# Altium PCB 16-channel-EEG-PCB.PcbDoc (part 3 of 3)
Units mm, origin at the board's own origin, x right, y up, seen from the top; angles counter-clockwise.
Board outline 86.9 x 82.1 mm, 4 copper layers (L1 (Signal), L2 (GND), L3 (PWR), L4 (Signal)), stack 1.57 mm thick; 128 components, 125 nets, 524 pads, 134 vias.
Unrouted connection lines stored in the file: 4.
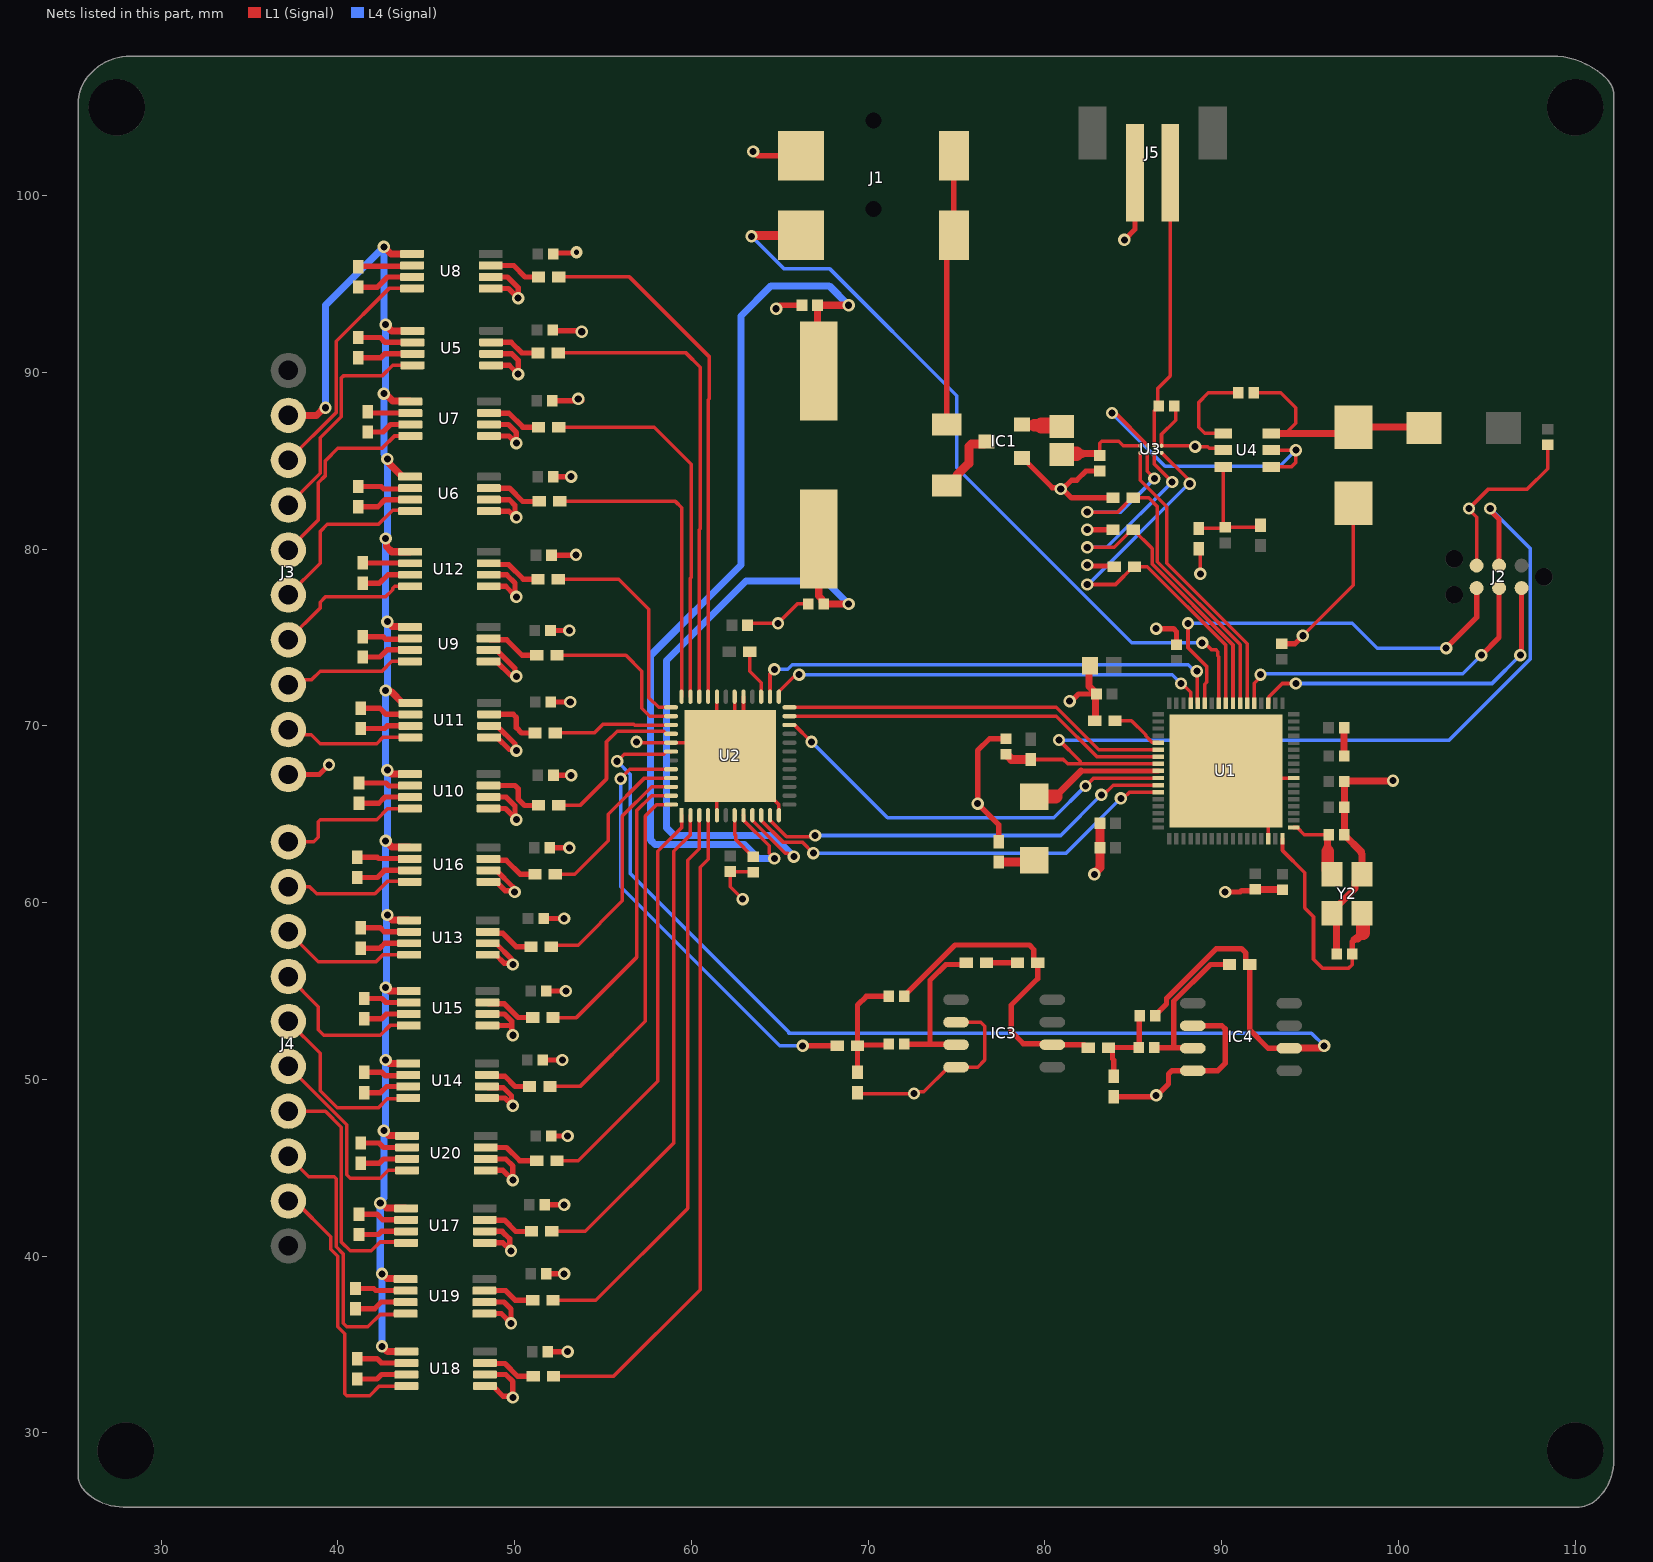
[diagram p4: the nets of this part, all layers, seen from the top]

## Via types
v1: diameter 0.7, hole 0.4, L1 (Signal) to L4 (Signal), 133 vias
v2: diameter 0.7, hole 0.3, L1 (Signal) to L4 (Signal), 1 vias

## Nets (pads, with @x,y where several pads share a name; then routed paths per layer and width w, separated by ;. In a path a pad name is that pad's centre, name@x,y a point inside that pad or via, vN(x,y) a via of type N, cw(c..) or ccw(c..) an arc to the next point about the centre after c; other vN are vias at no path point) (continued)
+3V7: C9.2 J5.2 U3.C2 | length 15.9
  L1 (Signal) w0.2: U3.C2@86.2,85.85 86.2,87.83 86.45,88.08 C9.2@86.45,88.1 86.4,88.15 86.4,89.1 87.1,89.8 J5.2@87.1,101.3
+5: F1.1 J1.1 | length 15.4
  L1 (Signal) w0.3: F1.1@74.45,87.05 74.45,97.35 J1.1@74.85,97.75 J1.1@74.85,102.25
ADC_DIN: U1.7 U2.23 | length 21.8
  L1 (Signal) w0.2: U2.23@65.551,70.55 80.65,70.55 82.949,68.251 U1.7@86.421,68.251
ADC_DOUT: U1.6 U2.24 | length 21.9
  L1 (Signal) w0.2: U2.24@65.551,71.05 80.65,71.05 83.049,68.651 U1.6@86.421,68.651
ADC_DRDY: U1.65 U2.25 | length 25
  L1 (Signal) w0.2: U2.25@64.95,71.651 64.95,71.936 65.818,72.804 66.004,72.804 v1(66.1,72.9) ; v1(87.7,72.4) 87.747,72.4 88.246,71.901 U1.65@88.246,71.276
  L4 (Signal) w0.2: v1(66.1,72.9) 87.2,72.9 v1(87.7,72.4)
ADC_INP: C24.2 IC4.6 R10.2 U2.42 | length 69.5
  L1 (Signal) w0.2: v1(55.8,68) 56.2,68.4 58.427,68.4 58.544,68.517 58.544,68.52 58.574,68.55 U2.42@58.849,68.55
  L1 (Signal) w0.3: C24.2@86.24,53.6 86.24,53.62 86.887,54.268 86.887,54.586 89.701,57.4 91.124,57.4 91.375,57.149 91.375,56.65 91.525,56.5 R10.2@91.6,56.5 91.6,52.8 92.635,51.765 IC4.6@93.825,51.765
  L1 (Signal) w0.4: IC4.6@93.825,51.765 95.665,51.765 v1(95.8,51.9)
  L4 (Signal) w0.2: v1(55.8,68) 56.55,67.25 56.55,61.65 65.5,52.7 65.5,52.617 95.083,52.617 v1(95.8,51.9)
ADC_MUX_OUT: R12.1 U2.44 | length 25.2
  L1 (Signal) w0.2: v1(56,67) 56,67.039 56.511,67.55 U2.44@58.849,67.55
  L1 (Signal) w0.3: v1(66.3,51.9) R12.1@68.25,51.9
  L4 (Signal) w0.2: v1(56,67) 56,60.9 65,51.9 v1(66.3,51.9)
ADC_PWDN: U1.12 U2.10 | length 25
  L1 (Signal) w0.2: U2.10@63.95,64.949 63.963,64.936 63.963,64.651 65.186,63.428 66.272,63.428 v1(66.9,62.8) ; v1(84.3,65.9) 84.435,65.9 84.786,66.251 U1.12@86.421,66.251
  L4 (Signal) w0.2: v1(66.9,62.8) 81.2,62.8 v1(84.3,65.9)
ADC_RST: U1.11 U2.11 | length 23.9
  L1 (Signal) w0.2: U2.11@64.45,64.949 64.45,64.664 65.386,63.728 66.928,63.728 v1(67,63.8) ; v1(83.2,66.1) 83.317,66.1 83.868,66.651 U1.11@86.421,66.651
  L4 (Signal) w0.2: v1(67,63.8) 80.9,63.8 v1(83.2,66.1)
ADC_SCLK: U1.10 U2.22 | length 24
  L1 (Signal) w0.2: U2.22@65.551,70.05 65.836,70.05 66.786,69.1 v1(66.8,69.1) ; v1(82.3,66.6) 82.317,66.6 82.768,67.051 U1.10@86.421,67.051
  L4 (Signal) w0.2: v1(66.8,69.1) 71.1,64.8 80.5,64.8 v1(82.3,66.6)
ADC_START: U1.64 U2.26 | length 27.6
  L1 (Signal) w0.2: U2.26@64.45,71.651 64.45,72.95 v1(64.7,73.2) ; v1(88.6,73.1) 88.623,73.077 88.623,71.299 U1.64@88.646,71.276
  L4 (Signal) w0.2: v1(64.7,73.2) 65.457,73.2 65.707,73.45 88.115,73.45 88.465,73.1 v1(88.6,73.1)
BARREL_JACK_SWITCH: J1.3 U1.61 | length 44.3
  L1 (Signal) w0.2: v1(88.9,74.7) 89.035,74.7 89.414,74.321 89.675,74.321 89.792,74.204 89.792,73.973 89.846,73.919 U1.61@89.846,71.276
  L1 (Signal) w0.5: v1(63.4,97.7) 63.454,97.7 63.504,97.75 J1.3@66.2,97.75
  L4 (Signal) w0.2: v1(63.4,97.7) 65.224,95.876 67.814,95.876 75.012,88.678 75.012,84.598 84.91,74.7 v1(88.9,74.7)
ELECTRODE_1: J3.3 U8.4 | length 13.4
  L1 (Signal) w0.2: J3.3@37.2,85.03 39.9,87.73 39.9,91.754 42.896,94.75 U8.4@44.2,94.75
ELECTRODE_1_AMPED: R24.2 U2.33 | length 29.6
  L1 (Signal) w0.2: R24.2@52.5,95.4 56.5,95.4 61,90.9 61,88.5 60.95,88.45 U2.33@60.95,71.651
ELECTRODE_2: J3.4 U5.4 | length 12.8
  L1 (Signal) w0.2: J3.4@37.2,82.49 39,84.29 39,86.3 40.2,87.5 40.2,89.683 40.317,89.8 42.5,89.8 43.102,90.402 U5.4@44.222,90.402
ELECTRODE_2_AMPED: R21.2 U2.34 | length 27
  L1 (Signal) w0.2: R21.2@52.475,91.1 59.7,91.1 60.5,90.3 60.5,81.149 60.45,81.099 U2.34@60.45,71.651
ELECTRODE_3: J3.5 U7.4 | length 11.3
  L1 (Signal) w0.2: J3.5@37.2,79.95 38.9,81.65 38.9,83.766 39.3,84.166 39.3,85 40,85.7 42.5,85.7 43.202,86.402 U7.4@44.102,86.402
ELECTRODE_3_AMPED: R23.2 U2.35 | length 21.5
  L1 (Signal) w0.2: R23.2@52.5,86.9 57.9,86.9 60,84.8 60,78.399 59.95,78.349 U2.35@59.95,71.651
ELECTRODE_4: J3.6 U6.4 | length 9.9
  L1 (Signal) w0.2: J3.6@37.2,77.41 39,79.21 39,81 39.4,81.4 42.3,81.4 43.1,82.2 44.044,82.2 U6.4@44.092,82.152
ELECTRODE_4_AMPED: R22.2 U2.36 | length 17.7
  L1 (Signal) w0.2: R22.2@52.55,82.7 59.1,82.7 59.45,82.35 U2.36@59.45,71.651
ELECTRODE_5: J3.7 U12.4 | length 8.4
  L1 (Signal) w0.2: J3.7@37.2,74.87 39,76.67 39,77 39.3,77.3 42.7,77.3 43.1,77.7 43.1,77.785 43.217,77.902 U12.4@44.089,77.902
ELECTRODE_5_AMPED: R32.2 U2.37 | length 12.3
  L1 (Signal) w0.2: R32.2@52.475,78.3 55.9,78.3 57.6,76.6 57.6,71.6 58.15,71.05 U2.37@58.849,71.05
ELECTRODE_6: J3.8 U9.4 | length 7.4
  L1 (Signal) w0.2: J3.8@37.2,72.33 37.47,72.6 38.5,72.6 39,73.1 42.5,73.1 43.052,73.652 U9.4@44.079,73.652
ELECTRODE_6_AMPED: R29.2 U2.38 | length 9.1
  L1 (Signal) w0.2: R29.2@52.4,74 56.3,74 57.2,73.1 57.2,71 57.65,70.55 U2.38@58.849,70.55
ELECTRODE_7: J3.9 U11.4 | length 7.4
  L1 (Signal) w0.2: J3.9@37.2,69.79 37.49,69.5 38.5,69.5 39,69 42.2,69 42.552,69.352 U11.4@44.109,69.352
ELECTRODE_7_AMPED: R31.2 U2.39 | length 6.8
  L1 (Signal) w0.2: R31.2@52.3,69.6 54.5,69.6 55,70.1 56.751,70.1 56.801,70.05 U2.39@58.849,70.05
ELECTRODE_8: J4.1 U10.4 | length 8.2
  L1 (Signal) w0.2: J4.1@37.2,63.44 38.64,63.44 38.9,63.7 38.9,64.583 39.017,64.7 42.2,64.7 42.825,65.325 U10.4@44.075,65.325
ELECTRODE_8_AMPED: R30.2 U2.40 | length 9.4
  L1 (Signal) w0.2: R30.2@52.5,65.5 53.7,65.5 55.2,67 55.2,69.1 55.8,69.7 58.427,69.7 58.544,69.583 58.544,69.58 58.574,69.55 U2.40@58.849,69.55
ELECTRODE_9: J4.2 U16.4 | length 7.3
  L1 (Signal) w0.2: J4.2@37.2,60.9 38.4,60.9 38.8,60.5 42.1,60.5 42.8,61.2 44.043,61.2 U16.4@44.067,61.176
ELECTRODE_9_AMPED: R40.2 U2.45 | length 9.7
  L1 (Signal) w0.2: R40.2@52.3,61.6 53.4,61.6 55.3,63.5 55.3,65 57.35,67.05 U2.45@58.849,67.05
ELECTRODE_10: J4.3 U13.4 | length 7.7
  L1 (Signal) w0.2: J4.3@37.2,58.36 38.9,56.66 42.16,56.66 42.552,57.052 U13.4@44.034,57.052
ELECTRODE_10_AMPED: R37.2 U2.46 | length 13.3
  L1 (Signal) w0.2: R37.2@52.075,57.5 52.175,57.6 53.6,57.6 56.1,60.1 56.1,64.9 57.75,66.55 U2.46@58.849,66.55
ELECTRODE_11: J4.4 U15.4 | length 9.2
  L1 (Signal) w0.2: J4.4@37.2,55.82 38.9,54.12 38.9,52.8 39.2,52.5 42.4,52.5 42.952,53.052 U15.4@44.014,53.052
ELECTRODE_11_AMPED: R39.2 U2.47 | length 16.7
  L1 (Signal) w0.2: R39.2@52.175,53.5 53.5,53.5 56.9,56.9 56.9,65.2 57.75,66.05 U2.47@58.849,66.05
ELECTRODE_12: J4.5 U14.4 | length 10.3
  L1 (Signal) w0.2: J4.5@37.2,53.28 39,51.48 39,49.364 39.964,48.4 42.3,48.4 42.8,48.9 43.929,48.9 U14.4@43.981,48.952
ELECTRODE_12_AMPED: R38.2 U2.48 | length 20.3
  L1 (Signal) w0.2: R38.2@52,49.6 53.7,49.6 57.4,53.3 57.4,64.9 58.05,65.55 U2.48@58.849,65.55
ELECTRODE_13: J4.6 U20.4 | length 11.2
  L1 (Signal) w0.2: J4.6@37.2,50.74 40.5,47.44 40.5,44.6 40.7,44.4 42.4,44.4 42.852,44.852 U20.4@43.918,44.852
ELECTRODE_13_AMPED: R48.2 U2.1 | length 23.2
  L1 (Signal) w0.2: R48.2@52.4,45.4 53.6,45.4 58.1,49.9 58.1,62.9 59.45,64.25 U2.1@59.45,64.949
ELECTRODE_14: J4.7 U17.4 | length 14
  L1 (Signal) w0.2: J4.7@37.2,48.2 39.3,48.2 40.2,47.3 40.2,40.8 40.7,40.3 41.9,40.3 42.4,40.8 43.81,40.8 U17.4@43.858,40.752
ELECTRODE_14_AMPED: R45.2 U2.2 | length 27.9
  L1 (Signal) w0.2: R45.2@52.1,41.4 54,41.4 59,46.4 59,62.9 59.95,63.85 U2.2@59.95,64.949
ELECTRODE_15: J4.8 U19.4 | length 15.5
  L1 (Signal) w0.2: J4.8@37.2,45.66 38.36,44.5 39.783,44.5 39.9,44.383 39.9,40.524 40.3,40.124 40.3,36.2 40.5,36 41.7,36 42.4,36.7 43.786,36.7 U19.4@43.838,36.752
ELECTRODE_15_AMPED: R47.2 U2.3 | length 32.3
  L1 (Signal) w0.2: R47.2@52.175,37.5 54.6,37.5 59.8,42.7 59.8,62.4 60.45,63.05 U2.3@60.45,64.949
ELECTRODE_16: J4.9 U18.4 | length 16.2
  L1 (Signal) w0.2: J4.9@37.2,43.12 37.58,43.12 39.6,41.1 39.6,40.4 40,40 40,36 40.4,35.6 40.4,32.217 40.517,32.1 41.8,32.1 42.352,32.652 U18.4@43.878,32.652
ELECTRODE_16_AMPED: R46.2 U2.4 | length 37.4
  L1 (Signal) w0.2: R46.2@52.2,33.2 55.6,33.2 60.5,38.1 60.5,62 60.95,62.45 U2.4@60.95,64.949
ELECTRODE_REF: J3.2 U5.1 U6.1 U7.1 U8.1 U9.1 U10.1 U11.1 U12.1 U13.1 U14.1 U15.1 U16.1 U17.1 U18.1 U19.1 U20.1 | length 100
  L1 (Signal) w0.4: J3.2@37.2,87.57 38.8,87.57 39.23,88 v1(39.3,88) ; v1(42.5,34.9) 42.798,34.602 U18.1@43.878,34.602 ; v1(42.5,39) 42.773,38.727 43.813,38.727 U19.1@43.838,38.702 ; v1(42.6,47.1) 42.873,46.827 43.893,46.827 U20.1@43.918,46.802 ; v1(42.6,88.8) 42.681,88.8 43.104,88.377 44.077,88.377 U7.1@44.102,88.352 ; v1(42.6,97.1) 43,96.7 U8.1@44.2,96.7 ; v1(42.7,51.1) 42.898,50.902 U14.1@43.981,50.902 ; v1(42.7,63.5) 43.049,63.151 44.042,63.151 U16.1@44.067,63.126 ; v1(42.7,72) 42.757,71.943 43.018,71.943 43.659,71.302 U11.1@44.109,71.302 ; v1(42.7,80.6) 42.757,80.543 42.757,80.143 43.048,79.852 U12.1@44.089,79.852 ; v1(42.7,92.7) 43.048,92.352 U5.1@44.222,92.352 ; v1(42.704,55.2) 42.902,55.002 U15.1@44.014,55.002 ; 42.754,42.727 43.833,42.727 U17.1@43.858,42.702 ; v1(42.8,59.3) 43.073,59.027 44.009,59.027 U13.1@44.034,59.002 ; v1(42.8,67.5) 43.025,67.275 U10.1@44.075,67.275 ; v1(42.8,75.9) 43.073,75.627 44.054,75.627 U9.1@44.079,75.602 ; v1(42.8,85.1) 42.857,85.043 42.857,84.887 43.642,84.102 U6.1@44.092,84.102
  L4 (Signal) w0.4: v1(39.3,88) 39.3,93.8 v1(42.6,97.1) 42.6,92.881 42.7,92.781 v1(42.7,92.7) 42.7,88.981 42.6,88.881 v1(42.6,88.8) 42.6,85.381 42.8,85.181 v1(42.8,85.1) 42.8,80.781 42.7,80.681 v1(42.7,80.6) 42.7,76.081 42.8,75.981 v1(42.8,75.9) 42.8,72.181 42.7,72.081 v1(42.7,72) 42.7,67.681 42.8,67.581 v1(42.8,67.5) 42.8,63.681 42.7,63.581 v1(42.7,63.5) 42.7,59.481 42.8,59.381 v1(42.8,59.3) 42.752,59.252 42.752,55.248 v1(42.704,55.2) 42.702,55.198 42.702,51.102 v1(42.7,51.1) 42.7,47.281 42.6,47.181 v1(42.6,47.1) 42.6,43.281 42.4,43.081 v1(42.4,43) 42.4,39.181 42.5,39.081 v1(42.5,39) v1(42.5,34.9)
GND: C1.2 C2.2 C3.2 C4.2 C5.1 C6.2 C7.1 C8.2 C9.1 C10.2 C11.2 C12.2 C13.2 C14.2 C15.2 C16.2 C17.2 C18.2 C20.1 C21.1 C30.1 C31.1 C32.1 C33.1 C34.1 C35.1 C36.1 C37.1 C38.1 C39.1 C40.1 C41.1 C42.1 C43.1 C44.1 C45.1 C46.1 C47.1 C48.1 D1.1 IC1.1 IC3.2 IC3.4 IC4.2 IC4.4 J1.2 J2.5 J3.10 J5.1 R1.1 R2.1 R3.1 R5.1 R6.1 R13.1 R15.1 R16.1 U1.32 U1.42 U1.69 U2.5 U2.12 U2.29 U2.30 U2.32 U2.41 U2.49 U3.D2 U4.2 U5.5 U5.6 U6.5 U6.6 U7.5 U7.6 U8.5 U8.6 U9.5 U9.6 U10.5 U10.6 U11.5 U11.6 U12.5 U12.6 U13.5 U13.6 U14.5 U14.6 U15.5 U15.6 U16.5 U16.6 U17.5 U17.6 U18.5 U18.6 U19.5 U19.6 U20.5 U20.6 Y2.2 Y2.4 | length 231
  L1 (Signal) w0.2: v1(56.9,69.1) 56.942,69.058 58.841,69.058 U2.41@58.849,69.05 U2.49@61.45,69.05 ; U2.5@61.45,64.949 61.45,67.55 U2.49@62.2,68.3 ; U2.32@61.45,71.651 U2.49@61.45,69.05 ; U2.30@62.45,71.651 U2.49@62.45,68.55 ; v1(62.9,60.2) 62.2,60.9 C5.1@62.2,61.76 63.46,61.76 C11.2@63.5,61.72 ; U2.29@62.95,71.651 62.95,69.05 U2.49@62.45,68.55 ; C20.1@63.18,75.7 63.28,75.8 v1(64.9,75.8) 66,76.9 C13.2@66.62,76.9 ; U2.12@64.95,64.949 64.946,64.952 64.946,65.554 U2.49@62.2,68.3 ; R15.1@69.4,49.25 69.45,49.2 v1(72.6,49.2) 72.696,49.296 73.151,49.296 74.55,50.695 IC3.4@74.975,50.695 76.195,50.695 76.6,51.1 76.6,53 76.365,53.235 IC3.2@74.975,53.235 ; C9.1@87.33,88.1 87.4,88.03 87.4,87.3 86.6,86.5 U3.D2@86.6,85.85 86.606,85.844 88.456,85.844 v1(88.5,85.8) 89.203,85.8 89.296,85.707 89.99,85.707 U4.2@90.097,85.6 ; R6.1@88.7,80.025 88.8,79.925 v1(88.8,78.6) ; U1.69@90.246,67.451 U1.69@90.646,67.051 ; U1.32@92.646,63.626 92.646,65.051 U1.69@90.646,67.051 ; U1.42@94.071,67.051 U1.69@90.646,67.051 ; v1(94.6,75.1) 97.45,77.95 D1.1@97.45,82.6 ; J2.5@104.43,79.07 104.43,81.811 104,82.241 v1(104,82.3) 105.1,83.4 107.3,83.4 108.45,84.55 C21.1@108.45,85.91 ; U2.49@61.45,69.05 U2.49@62.2,68.3 ; U2.49@62.2,68.3 U2.49@62.45,68.55
  L1 (Signal) w0.3: J3.10@37.2,67.25 38.95,67.25 v1(39.5,67.8) ; U19.5@48.288,36.752 49.248,36.752 v1(49.8,36.2) 49.8,37 49.398,37.402 U19.6@48.288,37.402 ; U17.5@48.308,40.752 49.348,40.752 v1@49.723,40.377 ; U17.6@48.308,41.402 49.298,41.402 49.723,40.977 v1@49.723,40.377 ; U18.5@48.328,32.652 48.778,32.652 49.353,32.077 49.823,32.077 v1(49.9,32) 49.9,32.9 49.498,33.302 U18.6@48.328,33.302 ; U20.5@48.368,44.852 49.348,44.852 v1(49.9,44.3) 49.9,45.1 49.498,45.502 U20.6@48.368,45.502 ; U14.5@48.431,48.952 49.448,48.952 v1@49.823,48.577 ; U14.6@48.431,49.602 48.506,49.527 49.373,49.527 49.823,49.077 v1@49.823,48.577 ; U15.5@48.464,53.052 49.724,53.052 ; U15.6@48.464,53.702 49.432,53.702 49.834,53.3 49.834,52.566 v1(49.9,52.5) ; U13.5@48.484,57.052 48.934,57.052 49.409,56.577 v1@49.823,56.577 ; U13.6@48.484,57.702 48.934,57.702 49.823,56.813 v1@49.823,56.577 ; U16.5@48.517,61.176 48.967,61.176 49.466,60.677 v1@49.923,60.677 ; U16.6@48.517,61.826 48.967,61.826 49.923,60.87 v1@49.923,60.677 ; U10.5@48.525,65.325 49.475,65.325 v1@50.023,64.777 ; U10.6@48.525,65.975 49.525,65.975 50.023,65.477 v1@50.023,64.777 ; U9.5@48.529,73.652 48.979,73.652 49.754,72.877 ; U9.6@48.529,74.302 48.979,74.302 50.023,73.258 50.023,72.877 v1(50.1,72.8) ; U12.5@48.539,77.902 49.498,77.902 v1@50.023,77.377 ; U12.6@48.539,78.552 49.548,78.552 50.023,78.077 v1@50.023,77.377 ; U6.5@48.542,82.152 49.667,82.152 50.019,81.8 v1(50.1,81.8) ; U6.6@48.542,82.802 49.698,82.802 50.023,82.477 v1@50.023,81.877 ; U7.5@48.552,86.402 49.677,86.402 50.079,86 v1(50.1,86) 50.1,86.6 49.648,87.052 U7.6@48.552,87.052 ; U11.5@48.559,69.352 49.009,69.352 49.684,68.677 ; U11.6@48.559,70.002 49.009,70.002 50.023,68.988 50.023,68.677 v1(50.1,68.6) ; U8.5@48.65,94.75 49.65,94.75 v1(50.2,94.2) 50.2,94.8 49.6,95.4 U8.6@48.65,95.4 ; U5.5@48.672,90.402 49.698,90.402 v1(50.2,89.9) 50.2,90.7 49.848,91.052 U5.6@48.672,91.052 ; v1(49.8,40.3) v1@49.723,40.377 ; v1(49.9,48.5) v1@49.823,48.577 ; v1(49.9,56.5) v1@49.823,56.577 ; v1(50,60.6) v1@49.923,60.677 ; v1(50.1,64.7) v1@50.023,64.777 ; v1(50.1,77.3) v1@50.023,77.377 ; C42.1@51.6,51.1 v1(52.7,51.1) ; C41.1@51.64,59.1 v1(52.8,59.1) ; C45.1@51.7,42.9 v1(52.8,42.9) ; C47.1@51.8,39 v1(52.8,39) ; C43.1@51.8,55 v1(52.9,55) ; C46.1@51.88,34.6 v1(53,34.6) ; C44.1@52,63.1 v1(53.1,63.1) ; C37.1@52.03,75.4 v1(53.1,75.4) ; C39.1@52.05,71.35 v1(53.15,71.35) v1@53.2,71.4 ; C48.1@52.08,46.8 v1(53,46.8) ; C40.1@52.09,79.65 53.45,79.65 v1@53.5,79.7 ; C35.1@52.14,88.4 v1@53.8,88.4 ; C33.1@52.15,92.4 52.2,92.35 53.75,92.35 v1(53.8,92.3) ; C34.1@52.18,84.1 v1(53.2,84.1) ; C36.1@52.18,96.7 52.23,96.75 53.45,96.75 v2(53.5,96.8) ; C38.1@52.2,67.2 v1(53.2,67.2) ; v1(63.5,102.5) 63.75,102.25 J1.2@66.2,102.25 ; v1(64.8,93.6) 65,93.8 C16.2@66.26,93.8 ; R5.1@77.4,63.45 77.4,64.4 v1(76.2,65.6) 76.2,68.6 76.88,69.28 C30.1@77.8,69.28 ; IC1.1@78.7,85.15 78.75,85.15 80.423,83.477 80.823,83.477 v1(80.9,83.4) v1@81.008,83.4 ; v1(81.4,71.4) 81.508,71.4 81.908,71.8 C15.2@82.92,71.8 ; v1(82.4,79.1) 82.45,79.05 83.875,79.05 R3.1@83.925,79 ; v1(82.4,81.1) R1.1@83.85,81.1 ; C7.1@83.1,84.42 82.32,84.42 81.8,83.9 81.508,83.9 v1@81.008,83.4 ; R2.1@83.85,82.9 81.508,82.9 v1@81.008,83.4 ; R16.1@83.9,49.025 86.225,49.025 v1(86.3,49.1) 86.356,49.1 87,49.744 87,50.3 87.195,50.495 IC4.4@88.375,50.495 89.795,50.495 90.2,50.9 90.2,52.859 90.024,53.035 IC4.2@88.375,53.035 ; v1(84.5,97.5) 85.1,98.1 J5.1@85.1,101.3 ; v1(86.3,75.5) 87.274,75.5 87.45,75.324 C3.2@87.45,74.6 ; v1(90.2,60.6) 91.052,60.6 91.13,60.678 91.818,60.678 C1.2@91.9,60.76 ; C8.2@93.4,74.64 94.14,74.64 v1(94.6,75.1)
  L1 (Signal) w0.4: C18.2@82.55,73.4 82.5,73.35 82.5,72.24 82.92,71.82 C15.2@82.92,71.8 82.872,71.752 82.872,70.347 R13.1@82.825,70.3 ; C1.2@91.9,60.76 91.92,60.74 93.43,60.74 C6.2@93.45,60.72 ; C32.1@96.51,57.1 96.51,59.14 Y2.2@96.25,59.4 96.25,59.5 97.55,60.8 97.55,61.2 Y2.4@97.95,61.6 97.95,62.75 97.9,62.8 97.9,62.88 96.95,63.83 C31.1@96.95,63.85 96.945,63.855 96.945,65.395 C14.2@96.94,65.4 96.945,65.405 96.945,66.845 C12.2@96.95,66.85 96.975,66.875 99.675,66.875 v1(99.7,66.9) ; C2.2@96.93,69.9 96.935,69.895 96.935,68.305 C10.2@96.94,68.3
  L1 (Signal) w0.5: v1(82.8,61.6) 82.8,61.654 83.12,61.974 C4.2@83.12,63.1 C17.2@83.12,64.5
  other v1: 53.475,79.675 53.6,88.5
MCU_BOOT0: R13.2 U1.5 | length 3
  L1 (Signal) w0.2: R13.2@83.975,70.3 84.9,70.3 85.7,69.5 85.7,69.439 86.063,69.076 86.396,69.076 U1.5@86.421,69.051
MCU_LED_A: D2.1 U1.9 | length 7.6
  L1 (Signal) w0.3: 82.051,67.451 U1.9@86.421,67.451
  L1 (Signal) w0.4: 80.6,66 82.051,67.451
  L1 (Signal) w0.8: D2.1@79.4,66 80.6,66
MCU_LED_C: D2.2 R5.2 | length 2
  L1 (Signal) w0.5: R5.2@77.4,62.3 79.3,62.3 D2.2@79.4,62.4
MCU_OSC_IN: C31.2 U1.35 Y2.1 | length 4.5
  L1 (Signal) w0.2: U1.35@94.071,64.251 94.271,64.251 94.672,63.85 C31.2@96.07,63.85
  L1 (Signal) w0.4: 96,63.1 96,63.78 C31.2@96.07,63.85
  L1 (Signal) w0.5: 96,62.9 96,63.1
  L1 (Signal) w0.7: 96,62.9 96,61.85 Y2.1@96.25,61.6
MCU_OSC_OUT: C32.2 U1.34 Y2.3 | length 13.3
  L1 (Signal) w0.2: U1.34@93.446,63.626 93.446,62.954 94.7,61.7 94.7,59.7 95.2,59.2 95.2,56.8 95.7,56.3 97.2,56.3 97.39,56.49 C32.2@97.39,57.1
  L1 (Signal) w0.3: C32.2@97.39,57.1 97.39,57.79 97.5,57.9
  L1 (Signal) w0.4: 97.5,57.9 97.6,58 97.7,58
  L1 (Signal) w0.5: 97.7,58 98,58.3
  L1 (Signal) w0.8: Y2.3@97.95,59.4 98,59.35 98,58.3
MCU_RST: C30.2 J2.3 R11.1 U1.8 | length 52.1
  L1 (Signal) w0.2: R11.1@79.2,68.1 81.043,68.1 81.292,67.851 82,67.851 ; v1(80.8,69.2) 82,68 82,67.851 ; U1.8@86.421,67.851 82,67.851
  L1 (Signal) w0.3: v1(105.2,82.3) 105.2,82.192 105.7,81.692 J2.3@105.7,79.07
  L1 (Signal) w0.5: C30.2@77.8,68.4 77.82,68.4 78.12,68.1 R11.1@79.2,68.1
  L4 (Signal) w0.2: v1(80.8,69.2) 102.878,69.2 107.45,73.772 107.45,80.05 v1(105.2,82.3)
MCU_SWCLK: J2.4 U1.56 | length 18.9
  L1 (Signal) w0.2: U1.56@91.846,71.276 91.846,72.411 92.2,72.765 v1(92.2,72.9)
  L1 (Signal) w0.3: v1(104.7,74) 105.7,75 J2.4@105.7,77.8
  L4 (Signal) w0.2: v1(92.2,72.9) 92.25,72.95 103.65,72.95 v1(104.7,74)
MCU_SWDIO: J2.2 U1.54 | length 19.4
  L1 (Signal) w0.2: U1.54@92.646,71.276 92.671,71.301 92.671,71.634 93.437,72.4 v1(94.2,72.4)
  L1 (Signal) w0.3: v1(106.9,74) 106.97,74.07 J2.2@106.97,77.8
  L4 (Signal) w0.2: v1(94.2,72.4) 105.3,72.4 v1(106.9,74)
MCU_SWO: J2.6 U1.63 | length 24.3
  L1 (Signal) w0.2: v1(88.1,75.8) 88.1,74.422 89.15,73.372 89.15,72.466 89.046,72.362 U1.63@89.046,71.276
  L1 (Signal) w0.3: v1(102.7,74.4) 104.43,76.13 J2.6@104.43,77.8
  L4 (Signal) w0.2: v1(88.1,75.8) 97.4,75.8 98.8,74.4 v1(102.7,74.4)
NetC7_2: C7.2 FB1.2 U3.A2 | length 5.3
  L1 (Signal) w0.2: C7.2@83.1,85.3 83.1,85.983 83.217,86.1 84.18,86.1 84.43,85.85 U3.A2@85.4,85.85
  L1 (Signal) w0.4: 82.1,85.4 83,85.4 C7.2@83.1,85.3
  L1 (Signal) w0.5: 81.8,85.4 82.1,85.4
  L1 (Signal) w0.8: FB1.2@80.95,85.35 81,85.4 81.8,85.4
NetC11_1: C11.1 U2.7 | length 2.8
  L1 (Signal) w0.2: U2.7@62.45,64.949 62.45,63.85 62.5,63.8 62.5,63.58 63.48,62.6 C11.1@63.5,62.6
NetC13_1: C13.1 U2.9 Y1.2 | length 39.4
  L1 (Signal) w0.2: U2.9@63.45,64.949 63.45,64.664 65.314,62.8 65.465,62.8 65.665,62.6 v1(65.8,62.6)
  L1 (Signal) w0.4: Y1.2@67.7,80.079 Y1.2@67.207,80.572 67.207,77.357 67.4,77.164 67.4,77 C13.1@67.5,76.9 v1(68.9,76.9)
  L4 (Signal) w0.4: v1(65.8,62.6) 64.6,63.8 59.034,63.8 58.6,64.234 58.6,73.7 63.1,78.2 67.6,78.2 v1(68.9,76.9)
NetC16_1: C16.1 U2.8 Y1.1 | length 55.2
  L1 (Signal) w0.2: U2.8@62.95,64.949 62.963,64.936 62.963,64.651 64.4,63.214 64.4,62.8 v1(64.7,62.5)
  L1 (Signal) w0.4: Y1.1@67.207,90.072 67.14,90.139 C16.1@67.14,93.8 v1(68.9,93.8)
  L4 (Signal) w0.4: v1(64.7,62.5) 63.8,62.5 63,63.3 57.934,63.3 57.7,63.534 57.7,74 62.8,79.1 62.8,93.2 64.5,94.9 67.8,94.9 v1(68.9,93.8)
NetC19_1: C19.1 U4.1 | length 5.4
  L1 (Signal) w0.2: U4.1@90.097,86.55 89.05,86.55 88.7,86.9 88.7,88.3 89.25,88.85 C19.1@90.95,88.85
NetC19_2: C19.2 D1.2 L1.1 U4.6 | length 13.2
  L1 (Signal) w0.2: C19.2@91.83,88.85 93.35,88.85 94.2,88 94.2,87.117 93.633,86.55
  L1 (Signal) w0.4: U4.6@92.803,86.55 93.633,86.55 97.1,86.55 D1.2@97.45,86.9 101.4,86.9 L1.1@101.45,86.85
NetC22_2: C22.2 R6.2 R7.2 U4.3 | length 7
  L1 (Signal) w0.2: R6.2@88.7,81.175 90.145,81.175 C22.2@90.2,81.23 ; U4.3@90.097,84.65 90.097,81.333 C22.2@90.2,81.23 ; R7.2@92.2,81.35 92.08,81.23 C22.2@90.2,81.23
NetC23_1: C23.1 C28.1 R12.2 R15.2 | length 7.5
  L1 (Signal) w0.3: R15.2@69.4,50.4 R12.2@69.4,51.9 69.45,51.95 71.11,51.95 C28.1@71.16,52 ; R12.2@69.4,51.95 69.4,54.2 69.9,54.7 C23.1@71.16,54.7
NetC23_2: C23.2 IC3.6 R9.2 R14.1 | length 18.8
  L1 (Signal) w0.3: C23.2@72.04,54.7 72.04,54.72 74.92,57.6 79.124,57.6 79.375,57.349 79.375,56.75 79.525,56.6 R9.2@79.6,56.6 79.6,55.7 78.1,54.2 78.1,52.7 78.778,52.022 80.368,52.022 IC3.6@80.425,51.965 82.21,51.965 82.375,51.8 R14.1@82.45,51.8
NetC24_1: C24.1 C29.1 R14.2 R16.2 | length 5.4
  L1 (Signal) w0.3: R14.2@83.65,51.75 R14.2@83.6,51.8 R14.2@83.675,51.8 ; R16.2@83.85,50.225 R16.2@83.9,50.175 83.9,51.1 83.825,51.175 83.825,51.65 R14.2@83.675,51.8 ; C24.1@85.36,53.6 85.34,53.58 85.34,51.82 C29.1@85.32,51.8 R14.2@83.675,51.8
NetC28_2: C28.2 IC3.3 R8.1 | length 9
  L1 (Signal) w0.3: C28.2@72.04,52 72.057,51.983 73.507,51.983 ; IC3.3@74.975,51.965 74.957,51.983 73.507,51.983 ; R8.1@75.55,56.6 75.45,56.5 74.4,56.5 73.507,55.607 73.507,51.983
NetC29_2: C29.2 IC4.3 R10.1 | length 8.9
  L1 (Signal) w0.3: C29.2@86.2,51.8 86.217,51.783 87.287,51.783 ; IC4.3@88.375,51.765 88.357,51.783 87.287,51.783 ; R10.1@90.45,56.5 89.367,56.5 87.287,54.42 87.287,51.783
NetF1_2: F1.2 IC1.3 | length 4
  L1 (Signal) w0.5: F1.2@74.45,83.6 74.65,83.6 75.025,83.975 75.025,84.175 75.7,84.85 75.7,85.807 75.843,85.95 76.55,85.95 IC1.3@76.7,86.1
NetFB1_1: FB1.1 IC1.2 | length 2.3
  L1 (Signal) w0.5: IC1.2@78.7,87.05 78.75,87 79.4,87
  L1 (Signal) w0.7: 79.4,87 79.8,87
  L1 (Signal) w0.9: 79.8,87 80.9,87 FB1.1@80.95,86.95
NetR4_2: R4.2 U2.27 | length 2.8
  L1 (Signal) w0.2: R4.2@63.3,74.2 63.3,73.1 63.95,72.45 U2.27@63.95,71.651
NetR8_2: R8.2 R9.1 | length 1.8
  L1 (Signal) w0.3: R8.2@76.7,56.6 R9.1@78.45,56.6
NetR17_1: R17.1 U5.3 | length 3.2
  L1 (Signal) w0.3: R17.1@41.15,90.825 42.423,90.825 42.65,91.052 U5.3@44.222,91.052
NetR17_2: R17.2 U5.2 | length 3.2
  L1 (Signal) w0.3: R17.2@41.15,91.975 42.4,91.975 42.673,91.702 U5.2@44.222,91.702
NetR18_1: R18.1 U6.3 | length 3.1
  L1 (Signal) w0.3: R18.1@41.15,82.4 42.27,82.4 42.672,82.802 U6.3@44.092,82.802
NetR18_2: R18.2 U6.2 | length 3
  L1 (Signal) w0.3: R18.2@41.15,83.55 42.45,83.55 42.6,83.4 44.04,83.4 U6.2@44.092,83.452
NetR19_1: R19.1 U7.3 | length 2.6
  L1 (Signal) w0.3: R19.1@41.7,86.625 42.563,86.625 42.99,87.052 U7.3@44.102,87.052
NetR19_2: R19.2 U7.2 | length 2.4
  L1 (Signal) w0.2: R19.2@41.7,87.775 R19.2@41.773,87.702
  L1 (Signal) w0.3: R19.2@41.773,87.702 U7.2@44.102,87.702
NetR20_1: R20.1 U8.3 | length 3.3
  L1 (Signal) w0.3: R20.1@41.15,94.825 42.238,94.825 42.813,95.4 U8.3@44.2,95.4
NetR20_2: R20.2 U8.2 | length 3.1
  L1 (Signal) w0.3: R20.2@41.15,95.975 41.187,96.013 44.162,96.013 U8.2@44.2,96.05
NetR21_1: R21.1 U5.7 | length 2.9
  L1 (Signal) w0.3: U5.7@48.672,91.702 49.81,91.702 50.412,91.1 R21.1@51.325,91.1
NetR22_1: R22.1 U6.7 | length 3.2
  L1 (Signal) w0.3: U6.7@48.542,83.452 49.708,83.452 50.46,82.7 R22.1@51.4,82.7
NetR23_1: R23.1 U7.7 | length 3.1
  L1 (Signal) w0.3: U7.7@48.552,87.702 48.567,87.687 49.677,87.687 50.464,86.9 R23.1@51.35,86.9
NetR24_1: R24.1 U8.7 | length 3
  L1 (Signal) w0.3: U8.7@48.65,96.05 49.95,96.05 50.6,95.4 R24.1@51.35,95.4
NetR25_1: R25.1 U9.3 | length 2.8
  L1 (Signal) w0.3: R25.1@41.4,73.9 42.389,73.9 42.791,74.302 U9.3@44.079,74.302
NetR25_2: R25.2 U9.2 | length 2.8
  L1 (Signal) w0.3: R25.2@41.4,75.05 42.55,75.05 42.7,74.9 44.027,74.9 U9.2@44.079,74.952
NetR26_1: R26.1 U10.3 | length 3
  L1 (Signal) w0.3: R26.1@41.2,65.625 42.313,65.625 42.663,65.975 U10.3@44.075,65.975
NetR26_2: R26.2 U10.2 | length 3
  L1 (Signal) w0.3: R26.2@41.2,66.775 42.725,66.775 42.9,66.6 44.05,66.6 U10.2@44.075,66.625
NetR27_1: R27.1 U11.3 | length 2.9
  L1 (Signal) w0.3: R27.1@41.3,69.85 42.65,69.85 42.802,70.002 U11.3@44.109,70.002
NetR27_2: R27.2 U11.2 | length 3
  L1 (Signal) w0.3: R27.2@41.3,71 42.381,71 42.729,70.652 U11.2@44.109,70.652
NetR28_1: R28.1 U12.3 | length 2.9
  L1 (Signal) w0.3: R28.1@41.4,78.075 42.356,78.075 42.833,78.552 U12.3@44.089,78.552
NetR28_2: R28.2 U12.2 | length 2.7
  L1 (Signal) w0.3: R28.2@41.4,79.225 41.411,79.213 44.077,79.213 U12.2@44.089,79.202
NetR29_1: R29.1 U9.7 | length 3.1
  L1 (Signal) w0.3: U9.7@48.529,74.952 48.604,74.877 49.548,74.877 50.425,74 R29.1@51.25,74
NetR30_1: R30.1 U10.7 | length 3.6
  L1 (Signal) w0.3: U10.7@48.525,66.625 50.024,66.625 50.2,66.449 50.2,65.866 50.566,65.5 R30.1@51.35,65.5
NetR31_1: R31.1 U11.7 | length 3.4
  L1 (Signal) w0.3: U11.7@48.559,70.652 49.924,70.652 50.1,70.476 50.1,69.9 50.4,69.6 R31.1@51.15,69.6
NetR32_1: R32.1 U12.7 | length 3.2
  L1 (Signal) w0.3: U12.7@48.539,79.202 48.609,79.131 49.664,79.131 50.495,78.3 R32.1@51.325,78.3
NetR33_1: R33.1 U13.3 | length 2.8
  L1 (Signal) w0.3: R33.1@41.3,57.425 42.379,57.425 42.656,57.702 U13.3@44.034,57.702
NetR33_2: R33.2 U13.2 | length 2.8
  L1 (Signal) w0.3: R33.2@41.3,58.575 42.406,58.575 42.628,58.352 U13.2@44.034,58.352
NetR34_1: R34.1 U14.3 | length 2.6
  L1 (Signal) w0.3: R34.1@41.5,49.25 42.415,49.25 42.767,49.602 U14.3@43.981,49.602
NetR34_2: R34.2 U14.2 | length 2.6
  L1 (Signal) w0.3: R34.2@41.5,50.4 42.5,50.4 42.7,50.2 43.929,50.2 U14.2@43.981,50.252
NetR35_1: R35.1 U15.3 | length 2.6
  L1 (Signal) w0.3: R35.1@41.5,53.425 42.469,53.425 42.745,53.702 U15.3@44.014,53.702
NetR35_2: R35.2 U15.2 | length 2.6
  L1 (Signal) w0.3: R35.2@41.5,54.575 42.496,54.575 42.719,54.352 U15.2@44.014,54.352
NetR36_1: R36.1 U16.3 | length 3.1
  L1 (Signal) w0.3: R36.1@41.1,61.425 42.233,61.425 42.634,61.826 U16.3@44.067,61.826
NetR36_2: R36.2 U16.2 | length 3
  L1 (Signal) w0.3: R36.2@41.1,62.575 42.225,62.575 42.3,62.5 44.043,62.5 U16.2@44.067,62.476
NetR37_1: R37.1 U13.7 | length 2.8
  L1 (Signal) w0.3: U13.7@48.484,58.352 48.559,58.277 49.323,58.277 50.1,57.5 R37.1@50.925,57.5
NetR38_1: R38.1 U14.7 | length 2.7
  L1 (Signal) w0.3: U14.7@48.431,50.252 48.506,50.177 49.448,50.177 50.025,49.6 R38.1@50.85,49.6
NetR39_1: R39.1 U15.7 | length 2.9
  L1 (Signal) w0.3: U15.7@48.464,54.352 48.539,54.277 49.423,54.277 50.2,53.5 R39.1@51.025,53.5
NetR40_1: R40.1 U16.7 | length 3
  L1 (Signal) w0.3: U16.7@48.517,62.476 48.592,62.401 49.524,62.401 50.325,61.6 R40.1@51.15,61.6
NetR41_1: R41.1 U17.3 | length 2.7
  L1 (Signal) w0.3: R41.1@41.2,41.225 42.29,41.225 42.468,41.402 U17.3@43.858,41.402
NetR41_2: R41.2 U17.2 | length 2.8
  L1 (Signal) w0.3: R41.2@41.2,42.375 42.218,42.375 42.54,42.052 U17.2@43.858,42.052
NetR42_1: R42.1 U18.3 | length 2.9
  L1 (Signal) w0.3: R42.1@41.1,33.05 42.213,33.05 42.465,33.302 U18.3@43.878,33.302
NetR42_2: R42.2 U18.2 | length 2.9
  L1 (Signal) w0.3: R42.2@41.1,34.2 42.215,34.2 42.463,33.952 U18.2@43.878,33.952
NetR43_1: R43.1 U19.3 | length 3
  L1 (Signal) w0.3: R43.1@41,37.025 42.081,37.025 42.458,37.402 U19.3@43.838,37.402
NetR43_2: R43.2 U19.2 | length 2.9
  L1 (Signal) w0.3: R43.2@41,38.175 42.025,38.175 42.148,38.052 U19.2@43.838,38.052
NetR44_1: R44.1 U20.3 | length 2.7
  L1 (Signal) w0.3: R44.1@41.3,45.25 42.333,45.25 42.585,45.502 U20.3@43.918,45.502
NetR44_2: R44.2 U20.2 | length 2.7
  L1 (Signal) w0.3: R44.2@41.3,46.4 42.335,46.4 42.583,46.152 U20.2@43.918,46.152
NetR45_1: R45.1 U17.7 | length 2.9
  L1 (Signal) w0.3: U17.7@48.308,42.052 48.326,42.034 49.433,42.034 50.067,41.4 R45.1@50.95,41.4
NetR46_1: R46.1 U18.7 | length 3
  L1 (Signal) w0.3: U18.7@48.328,33.952 48.355,33.925 49.453,33.925 50.177,33.2 R46.1@51.05,33.2
NetR47_1: R47.1 U19.7 | length 3
  L1 (Signal) w0.3: U19.7@48.288,38.052 49.493,38.052 50.045,37.5 R47.1@51.025,37.5
NetR48_1: R48.1 U20.7 | length 3.2
  L1 (Signal) w0.3: U20.7@48.368,46.152 49.545,46.152 50.297,45.4 R48.1@51.25,45.4
POWER_INT: U1.57 U3.A1 | length 16.7
  L1 (Signal) w0.2: U3.A1@85.4,85.45 85.4,83.9 86.9,82.4 86.9,79.2 91.446,74.654 U1.57@91.446,71.276
POWER_OUT: U3.B2 U4.4 U4.5 | length 18.4
  L1 (Signal) w0.2: v1(83.8,87.7) 83.995,87.7 85.715,85.98 85.715,85.943 85.8,85.858 U3.B2@85.8,85.85 ; U4.4@92.803,84.65 93.95,84.65 94.2,84.9 v1(94.2,85.6) U4.5@92.803,85.6
  L4 (Signal) w0.2: v1(83.8,87.7) 86.8,84.7 93.3,84.7 v1(94.2,85.6)
POWER_SCL: R2.2 U1.58 U3.B1 | length 23.8
  L1 (Signal) w0.2: v1(82.4,82.1) 84.125,82.1 84.925,82.9 R2.2@85,82.9 85.883,82.9 86.367,82.416 86.367,79.281 91.046,74.603 U1.58@91.046,71.276 ; U3.B1@85.8,85.45 85.8,84.4 v1(86.2,84)
  L4 (Signal) w0.2: v1(82.4,82.1) 84.3,82.1 v1(86.2,84)
POWER_SDA: R1.2 U1.59 U3.C1 | length 23.6
  L1 (Signal) w0.2: v1(82.4,80.1) 83.925,80.1 84.925,81.1 R1.2@85,81.1 86.067,80.033 86.067,79.157 90.646,74.578 U1.59@90.646,71.276 ; U3.C1@86.2,85.45 86.2,84.8 v1(87.2,83.8)
  L4 (Signal) w0.2: v1(82.4,80.1) 83.5,80.1 v1(87.2,83.8)
POWER_TS/MR: R3.2 U1.60 U3.D1 | length 24
  L1 (Signal) w0.2: v1(82.4,78) 84,78 85,79 85.8,79 90.246,74.554 U1.60@90.246,71.276 ; U3.D1@86.6,85.45 88.104,83.946 88.104,83.796 v1(88.2,83.7)
  L4 (Signal) w0.2: v1(82.4,78) 82.45,78 88.15,83.7 v1(88.2,83.7)
pads on no net: IC3.1 IC3.5 IC3.8 IC4.1 IC4.5 IC4.8 J1.M J2. J3.1 J4.10 J5.3 J5.4 U1.2 U1.3 U1.4 U1.15 U1.16 U1.17 U1.18 U1.19 U1.20 U1.21 U1.22 U1.23 U1.24 U1.25 U1.26 U1.27 U1.28 U1.29 U1.31 U1.36 U1.37 U1.38 U1.39 U1.40 U1.46 U1.47 U1.48 U1.49 U1.50 U1.51 U1.52 U1.53 U1.62 U1.66 U1.67 U2.13 U2.14 U2.15 U2.16 U2.17 U2.18 U2.19 U2.20 U2.21 U2.43
copper on no net: | length 333.5
  L1 (Signal) w0.254: 25.3,27.668 ccw(c26.672,27.668) 25.702,26.698 ccw(c27.87,28.866) 27.87,25.8 29.17,25.8 110.09,25.8 ccw(c110.09,27.514) 111.302,26.302 ccw(c109.134,28.47) 112.2,28.47 112.2,105.632 ccw(c110.828,105.632) 111.798,106.602 ccw(c108.664,103.468) 108.664,107.9 28.27,107.9 ccw(c28.27,104.834) 26.102,107.002 26,106.9 ccw(c27.69,105.21) 25.3,105.21 25.3,27.668

## Polygon pours and split planes (outlines as drawn)
GND on L2 (GND) "GND_L02_P001" (solid, pour order 1): 25.6,96.3 25.6,104.96 cw(c28.14,104.96) 28.14,107.5 109.36,107.5 cw(c109.36,104.96) 111.9,104.96 111.9,28.5 cw(c109.6,28.5) 109.6,26.2 28.04,26.2 cw(c28.04,28.74) 25.5,28.74 25.5,96.2 cw(c25.6,96.2)
+3V3 on L3 (PWR) "+3V3_L03_P005" (solid, pour order 5): 25.9,101.6 25.9,104.46 cw(c28.44,104.46) 28.44,107 109.4,107 cw(c109.4,105) 111.4,105 111.4,28.2 cw(c110.2,28.2) 110.2,27 26,27

## Silkscreen, mask and mechanical layers (free items; w line width, h text height)
Top Overlay:
  text "JST BATTERY CONNECTOR" at 91.3,102.9 h0.7
  text "DC CHARGING PORT" at 58.1,102.7 h0.7
  text "VOLTAGE REGULATOR" at 89.5,90.7 h0.7
  text "BMS/CHARGING MANAGEMENT" at 78.4,89.8 h0.7
  text "TC2030 SWD" at 100.9,72.2 h0.7
  text "16-CHANNEL MUX-ADC" at 66.2,65.8 h0.7
  text "STM32WB55RGV7" at 80.5,59.9 h0.7
  text "BESSEL BAND PASS FILTER" at 73.4,45.5 h0.7
  text "ELECTRODE CONNECTORS" at 27.9,35.2 h1
  text "ANDY NGUYEN JANUARY 31, 2024" at 79.3,31.7 h1.5
  text "INA826 PREAMPLIFIER" at 41.4,28 h1

## Text inside footprints (layer, text, board x,y; h text height)
U4: Top Overlay "*" at 89.053,87.35 h1.27; Mechanical 13 "*" at 90.663,85.752 h1.27